# EAGLE board Amplifier_v1.1 (EAGLE 7.1.0)

Size 100 x 80 mm. Coordinates in mm from the lower left corner, seen from the top.
Outline: 0,0 100,0 100,80 0,80 0,0
Copper layers (1*16): Top 0.035mm / dielectric 1.5mm / Bottom 0.035mm
Design rules "default": minimum track width 10mil, minimum drill 24mil, track to track 8mil, track to pad 8mil, pad to pad 8mil, via to via 8mil, smd to smd 8mil, copper to edge 40mil, drill to drill 8mil, minimum pad ring 10mil, minimum via ring 8mil, stop-mask expansion 4mil, vias tented up to drill 0mil, thermal gap 10mil

## Footprints (pad centres in the part's own frame; a part is rotated, then mirrored left to right if it is on the bottom)
SMT_PAD_3MM = smd 3 x 3: PAD 0,0
C025-024X044 = drill 0.813 octagon: 1 -1.27,0; 2 1.27,0
E2,5-6 = drill 0.813 pad 1.6: + -1.27,0 | drill 0.813 pad 1.6 octagon: - 1.27,0
DIL08 = drill 0.813 pad 1.27: 1 -3.81,-3.81; 2 -1.27,-3.81; 3 1.27,-3.81; 4 3.81,-3.81; 5 3.81,3.81; 6 1.27,3.81; 7 -1.27,3.81; 8 -3.81,3.81
SMT_PAD_5MM = smd 5 x 5: PAD 0,0
2-1623788-1 = drill 0.9: P$3 -2.5,0; P$4 2.5,0
0204V = drill 0.813 octagon: 1 -1.27,0; 2 1.27,0
B25U = drill 0.813 long: A 2.54,-0.889; E -2.54,-0.889; S 0,-0.889
NDN0015A = drill 0.7 pad 1.25: 1 0,0; 2 0.965,2.54; 3 1.93,0; 4 2.895,2.54; 5 3.86,0; 6 4.825,2.54; 7 5.79,0; 8 6.755,2.54; 9 7.72,0; 10 8.685,2.54; 11 9.65,0; 12 11.58,2.54; 13 13.51,0; 14 15.44,2.54; 15 17.37,0
TONE_POT_2GANG = drill 1: 1_1 -6,-3; 1_2 -2,-3; 1_3 2,-3; 2_1 -4,-3; 2_2 0,-3; 2_3 4,-3 | hole 1: 6,-3 | hole 3.3: -7.15,0.3; 7.15,0.3
INDUCTOR = drill 0.7 long: 1 -2.5,0; 2 2.5,0
VOL_POT_2GANG = drill 1.3: 1_1 -5,-2; 1_2 0,-2; 1_3 5,-2; 2_1 -5,3; 2_2 0,3; 2_3 5,3
MOLEX_6P = drill 1.8: P$1 6.45,2.42; P$2 -2.15,2.42; P$3 2.15,2.42; P$4 -2.15,8.12; P$5 2.15,8.12; P$6 6.45,8.12 | hole 3: -2.15,-5.08; 6.45,-5.08

## Placement (x,y rotation side)
B_R_B  SMT_PAD_3MM  [SMT_PAD_3MM]  -101.6,-72.39 0 top  (outside the outline)
B_R_B1  SMT_PAD_3MM  [SMT_PAD_3MM]  -127,-735.33 0 top  (outside the outline)
B_R_B2  SMT_PAD_3MM  [SMT_PAD_3MM]  -127,-788.67 0 top  (outside the outline)
B_R_C  SMT_PAD_3MM  [SMT_PAD_3MM]  -101.6,-77.47 0 top  (outside the outline)
B_R_C1  SMT_PAD_3MM  [SMT_PAD_3MM]  -118.11,-735.33 0 top  (outside the outline)
B_R_C2  SMT_PAD_3MM  [SMT_PAD_3MM]  -118.11,-788.67 0 top  (outside the outline)
B_R_E  SMT_PAD_3MM  [SMT_PAD_3MM]  -101.6,-67.31 0 top  (outside the outline)
B_R_E1  SMT_PAD_3MM  [SMT_PAD_3MM]  -152.4,-740.41 0 top  (outside the outline)
B_R_E2  SMT_PAD_3MM  [SMT_PAD_3MM]  -152.4,-793.75 0 top  (outside the outline)
C1  [C025-024X044]  -25.4,93.98 0 top  (outside the outline)
C2  100uF  [E2,5-6]  -91.44,-10.16 0 top  (outside the outline)
C3  [C025-024X044]  -30.48,93.98 0 top  (outside the outline)
C4  [C025-024X044]  -35.56,93.98 0 top  (outside the outline)
C5  [C025-024X044]  -40.64,93.98 0 top  (outside the outline)
C6  [C025-024X044]  -45.72,93.98 0 top  (outside the outline)
C7  [C025-024X044]  -50.8,93.98 0 top  (outside the outline)
C8  [C025-024X044]  -55.88,93.98 0 top  (outside the outline)
C9  [C025-024X044]  -133.35,-840.74 0 top  (outside the outline)
C10  [C025-024X044]  -128.27,-840.74 0 top  (outside the outline)
C11  [C025-024X044]  -123.19,-840.74 0 top  (outside the outline)
C12  [C025-024X044]  -118.11,-840.74 0 top  (outside the outline)
C13  [C025-024X044]  -113.03,-840.74 0 top  (outside the outline)
C14  [C025-024X044]  -107.95,-840.74 0 top  (outside the outline)
C15  [C025-024X044]  -152.4,-849.63 0 top  (outside the outline)
C16  100uF  [E2,5-6]  -91.44,-16.51 0 top  (outside the outline)
C17  0.1uF  [C025-024X044]  -92.71,-22.86 0 top  (outside the outline)
C18  0.1uF  [C025-024X044]  -92.71,-27.94 0 top  (outside the outline)
C19  22pF  [C025-024X044]  -92.71,-34.29 0 top  (outside the outline)
C20  22pF  [C025-024X044]  -101.6,-40.64 0 top  (outside the outline)
C21  22pF  [C025-024X044]  -101.6,-57.15 0 top  (outside the outline)
C22  100uF  [E2,5-6]  -100.33,-140.97 0 top  (outside the outline)
C23  100uF  [E2,5-6]  -100.33,-148.59 0 top  (outside the outline)
C24  0.1uF  [C025-024X044]  -101.6,-154.94 0 top  (outside the outline)
C25  0.1uF  [C025-024X044]  -101.6,-161.29 0 top  (outside the outline)
C26  0.1uF  [C025-024X044]  -101.6,-172.72 0 top  (outside the outline)
C27  100uF  [E2,5-6]  -100.33,-180.34 0 top  (outside the outline)
C29  0.1uF  [C025-024X044]  -106.68,-440.69 0 top  (outside the outline)
C31  0.1uF  [C025-024X044]  -106.68,-454.66 0 top  (outside the outline)
C33  0.1uF  [C025-024X044]  -106.68,-476.25 0 top  (outside the outline)
C35  0.1uF  [C025-024X044]  -100.33,-476.25 0 top  (outside the outline)
C36  100uF  [E2,5-6]  -129.54,-640.08 0 top  (outside the outline)
C37  0.1uF  [C025-024X044]  -106.68,-497.84 0 top  (outside the outline)
C38  100uF  [E2,5-6]  -129.54,-647.7 0 top  (outside the outline)
C39  0.1uF  [C025-024X044]  -100.33,-497.84 0 top  (outside the outline)
C40  0.1uF  [C025-024X044]  -129.54,-654.05 0 top  (outside the outline)
C41  0.1uF  [C025-024X044]  -106.68,-519.43 0 top  (outside the outline)
C42  0.1uF  [C025-024X044]  -129.54,-679.45 0 top  (outside the outline)
C43  0.1uF  [C025-024X044]  -100.33,-519.43 0 top  (outside the outline)
C44  100uF  [E2,5-6]  -135.89,-692.15 0 top  (outside the outline)
C45  0.1uF  [C025-024X044]  -106.68,-541.02 0 top  (outside the outline)
C46  100uF  [E2,5-6]  -123.19,-692.15 0 top  (outside the outline)
C47  0.1uF  [C025-024X044]  -100.33,-541.02 0 top  (outside the outline)
C48  0.1uF  [C025-024X044]  -132.08,-708.66 0 top  (outside the outline)
C49  0.1uF  [C025-024X044]  -106.68,-562.61 0 top  (outside the outline)
C50  0.1uF  [C025-024X044]  -125.73,-708.66 0 top  (outside the outline)
C51  0.1uF  [C025-024X044]  -100.33,-562.61 0 top  (outside the outline)
C52  22pF  [C025-024X044]  -127,-716.28 0 top  (outside the outline)
C53  0.1uF  [C025-024X044]  -106.68,-584.2 0 top  (outside the outline)
C54  22pF  [C025-024X044]  -120.65,-716.28 0 top  (outside the outline)
C55  0.1uF  [C025-024X044]  -100.33,-584.2 0 top  (outside the outline)
C56  22pF  [C025-024X044]  -114.3,-716.28 0 top  (outside the outline)
C57  100uF  [E2,5-6]  -151.13,-702.31 0 top  (outside the outline)
C58  100uF  [E2,5-6]  -138.43,-702.31 0 top  (outside the outline)
C59  0.1uF  [C025-024X044]  -119.38,-708.66 0 top  (outside the outline)
C60  0.1uF  [C025-024X044]  -152.4,-716.28 0 top  (outside the outline)
C61  0.1uF  [C025-024X044]  -146.05,-716.28 0 top  (outside the outline)
C62  100uF  [E2,5-6]  -125.73,-702.31 0 top  (outside the outline)
C63  0.1uF  [C025-024X044]  -139.7,-716.28 0 top  (outside the outline)
C64  0.1uF  [C025-024X044]  -133.35,-716.28 0 top  (outside the outline)
C65  100uF  [E2,5-6]  -135.89,-745.49 0 top  (outside the outline)
C66  100uF  [E2,5-6]  -123.19,-745.49 0 top  (outside the outline)
C67  0.1uF  [C025-024X044]  -132.08,-762 0 top  (outside the outline)
C68  0.1uF  [C025-024X044]  -125.73,-762 0 top  (outside the outline)
C69  22pF  [C025-024X044]  -127,-769.62 0 top  (outside the outline)
C70  22pF  [C025-024X044]  -120.65,-769.62 0 top  (outside the outline)
C71  22pF  [C025-024X044]  -114.3,-769.62 0 top  (outside the outline)
C72  100uF  [E2,5-6]  -151.13,-755.65 0 top  (outside the outline)
C73  100uF  [E2,5-6]  -138.43,-755.65 0 top  (outside the outline)
C74  0.1uF  [C025-024X044]  -119.38,-762 0 top  (outside the outline)
C75  0.1uF  [C025-024X044]  -152.4,-769.62 0 top  (outside the outline)
C76  0.1uF  [C025-024X044]  -146.05,-769.62 0 top  (outside the outline)
C77  100uF  [E2,5-6]  -125.73,-755.65 0 top  (outside the outline)
C78  0.1uF  [C025-024X044]  -139.7,-769.62 0 top  (outside the outline)
C79  0.1uF  [C025-024X044]  -133.35,-769.62 0 top  (outside the outline)
IC1  NE5532N  [DIL08]  -101.6,-222.25 0 top  (outside the outline)
IC2  NE5532N  [DIL08]  -101.6,-232.41 0 top  (outside the outline)
IC3  NE5532N  [DIL08]  -101.6,-303.53 0 top  (outside the outline)
IC4  NE5532N  [DIL08]  -101.6,-360.68 0 top  (outside the outline)
IC5  NE5532N  [DIL08]  -88.9,-360.68 0 top  (outside the outline)
IC6  NE5532N  [DIL08]  -76.2,-360.68 0 top  (outside the outline)
IC7  NE5532N  [DIL08]  -101.6,-283.21 0 top  (outside the outline)
IC10  NE5532N  [DIL08]  -147.32,-822.96 0 top  (outside the outline)
IC11  NE5532N  [DIL08]  -134.62,-822.96 0 top  (outside the outline)
IC12  NE5532N  [DIL08]  -121.92,-822.96 0 top  (outside the outline)
IC13  NE5532N  [DIL08]  -109.22,-822.96 0 top  (outside the outline)
N_B  SMT_PAD_5MM  [SMT_PAD_5MM]  -100.33,-111.76 0 top  (outside the outline)
N_B1  SMT_PAD_5MM  [SMT_PAD_5MM]  -125.73,-728.98 0 top  (outside the outline)
N_B2  SMT_PAD_5MM  [SMT_PAD_5MM]  -125.73,-782.32 0 top  (outside the outline)
N_D  SMT_PAD_5MM  [SMT_PAD_5MM]  -100.33,-124.46 0 top  (outside the outline)
N_D1  SMT_PAD_5MM  [SMT_PAD_5MM]  -119.38,-728.98 0 top  (outside the outline)
N_D2  SMT_PAD_5MM  [SMT_PAD_5MM]  -119.38,-782.32 0 top  (outside the outline)
N_S  SMT_PAD_5MM  [SMT_PAD_5MM]  -100.33,-118.11 0 top  (outside the outline)
N_S1  SMT_PAD_5MM  [SMT_PAD_5MM]  -152.4,-735.33 0 top  (outside the outline)
N_S2  SMT_PAD_5MM  [SMT_PAD_5MM]  -152.4,-788.67 0 top  (outside the outline)
P_B  SMT_PAD_5MM  [SMT_PAD_5MM]  -100.33,-92.71 0 top  (outside the outline)
P_B1  SMT_PAD_5MM  [SMT_PAD_5MM]  -146.05,-735.33 0 top  (outside the outline)
P_B2  SMT_PAD_5MM  [SMT_PAD_5MM]  -146.05,-788.67 0 top  (outside the outline)
P_D  SMT_PAD_5MM  [SMT_PAD_5MM]  -100.33,-99.06 0 top  (outside the outline)
P_D1  SMT_PAD_5MM  [SMT_PAD_5MM]  -139.7,-735.33 0 top  (outside the outline)
P_D2  SMT_PAD_5MM  [SMT_PAD_5MM]  -139.7,-788.67 0 top  (outside the outline)
P_S  SMT_PAD_5MM  [SMT_PAD_5MM]  -100.33,-105.41 0 top  (outside the outline)
P_S1  SMT_PAD_5MM  [SMT_PAD_5MM]  -133.35,-735.33 0 top  (outside the outline)
P_S2  SMT_PAD_5MM  [SMT_PAD_5MM]  -133.35,-788.67 0 top  (outside the outline)
PR1  0.1  [2-1623788-1]  -177.8,-890.27 0 top  (outside the outline)
PR2  0.1  [2-1623788-1]  -191.77,-890.27 0 top  (outside the outline)
PR3  0.1  [2-1623788-1]  -205.74,-890.27 0 top  (outside the outline)
PR4  0.1  [2-1623788-1]  -219.71,-890.27 0 top  (outside the outline)
PR5  0.1  [2-1623788-1]  -233.68,-890.27 0 top  (outside the outline)
PR6  0.1  [2-1623788-1]  -247.65,-890.27 0 top  (outside the outline)
R1  [0204V]  -147.32,-849.63 0 top  (outside the outline)
R2  [0204V]  -54.61,62.23 0 top  (outside the outline)
R3  [0204V]  -104.14,-292.1 0 top  (outside the outline)
R4  [0204V]  -104.14,-297.18 0 top  (outside the outline)
R5  [0204V]  -104.14,-331.47 0 top  (outside the outline)
R6  [0204V]  -85.09,62.23 0 top  (outside the outline)
R7  [0204V]  -17.78,73.66 0 top  (outside the outline)
R8  [0204V]  -27.94,73.66 0 top  (outside the outline)
R9  [0204V]  -38.1,73.66 0 top  (outside the outline)
R10  [0204V]  -48.26,73.66 0 top  (outside the outline)
R11  [0204V]  -58.42,73.66 0 top  (outside the outline)
R12  [0204V]  -68.58,73.66 0 top  (outside the outline)
R13  [0204V]  -78.74,73.66 0 top  (outside the outline)
R14  [0204V]  -88.9,73.66 0 top  (outside the outline)
R15  [0204V]  -17.78,78.74 0 top  (outside the outline)
R16  [0204V]  -93.98,-321.31 0 top  (outside the outline)
R17  [0204V]  -104.14,-326.39 0 top  (outside the outline)
R18  [0204V]  -93.98,-326.39 0 top  (outside the outline)
R19  [0204V]  -142.24,-849.63 0 top  (outside the outline)
R20  [0204V]  -137.16,-849.63 0 top  (outside the outline)
R21  [0204V]  -132.08,-849.63 0 top  (outside the outline)
R22  [0204V]  -127,-849.63 0 top  (outside the outline)
R23  [0204V]  -121.92,-849.63 0 top  (outside the outline)
R24  [0204V]  -116.84,-849.63 0 top  (outside the outline)
R25  [0204V]  -111.76,-849.63 0 top  (outside the outline)
R26  [0204V]  -106.68,-849.63 0 top  (outside the outline)
R27  [0204V]  -151.13,-854.71 0 top  (outside the outline)
R28  [0204V]  -146.05,-854.71 0 top  (outside the outline)
R29  [0204V]  -140.97,-854.71 0 top  (outside the outline)
R30  [0204V]  -135.89,-854.71 0 top  (outside the outline)
R31  [0204V]  -130.81,-854.71 0 top  (outside the outline)
R32  [0204V]  -125.73,-854.71 0 top  (outside the outline)
R33  [0204V]  -120.65,-854.71 0 top  (outside the outline)
R34  [0204V]  -48.26,88.9 0 top  (outside the outline)
R35  [0204V]  -58.42,88.9 0 top  (outside the outline)
R36  [0204V]  -115.57,-854.71 0 top  (outside the outline)
R37  [0204V]  -110.49,-854.71 0 top  (outside the outline)
R38  [0204V]  -105.41,-854.71 0 top  (outside the outline)
R39  [0204V]  -166.37,-894.08 0 top  (outside the outline)
R43  [B25U]  -100.33,-31.75 0 top  (outside the outline)
R44  1.2k  [0204V]  -99.06,-46.99 0 top  (outside the outline)
R45  500  [0204V]  -99.06,-52.07 0 top  (outside the outline)
R46  12k  [0204V]  -99.06,-63.5 0 top  (outside the outline)
R47  1.2k  [0204V]  -99.06,-82.55 0 top  (outside the outline)
R48  1.2k  [0204V]  -99.06,-87.63 0 top  (outside the outline)
R51  10  [0204V]  -99.06,-167.64 0 top  (outside the outline)
R52  1.2k  [0204V]  -99.06,-186.69 0 top  (outside the outline)
R53  1.2k  [0204V]  -129.54,-660.4 0 top  (outside the outline)
R54  1.2k  [0204V]  -129.54,-666.75 0 top  (outside the outline)
R55  1.2k  [0204V]  -129.54,-673.1 0 top  (outside the outline)
R56  1.2k  [0204V]  -129.54,-685.8 0 top  (outside the outline)
R57  [B25U]  -137.16,-681.99 0 top  (outside the outline)
R58  [B25U]  -151.13,-694.69 0 top  (outside the outline)
R59  1.2k  [0204V]  -151.13,-722.63 0 top  (outside the outline)
R60  500  [0204V]  -146.05,-722.63 0 top  (outside the outline)
R61  12k  [0204V]  -140.97,-722.63 0 top  (outside the outline)
R62  1.2k  [0204V]  -135.89,-722.63 0 top  (outside the outline)
R63  1.2k  [0204V]  -130.81,-722.63 0 top  (outside the outline)
R66  10  [0204V]  -115.57,-722.63 0 top  (outside the outline)
R67  1.2k  [0204V]  -151.13,-728.98 0 top  (outside the outline)
R68  1.2k  [0204V]  -146.05,-728.98 0 top  (outside the outline)
R69  1.2k  [0204V]  -140.97,-728.98 0 top  (outside the outline)
R70  1.2k  [0204V]  -135.89,-728.98 0 top  (outside the outline)
R71  1.2k  [0204V]  -130.81,-728.98 0 top  (outside the outline)
R72  [B25U]  -143.51,-694.69 0 top  (outside the outline)
R73  [B25U]  -151.13,-748.03 0 top  (outside the outline)
R74  1.2k  [0204V]  -151.13,-775.97 0 top  (outside the outline)
R75  500  [0204V]  -146.05,-775.97 0 top  (outside the outline)
R76  12k  [0204V]  -140.97,-775.97 0 top  (outside the outline)
R77  1.2k  [0204V]  -135.89,-775.97 0 top  (outside the outline)
R78  1.2k  [0204V]  -130.81,-775.97 0 top  (outside the outline)
R81  10  [0204V]  -115.57,-775.97 0 top  (outside the outline)
R82  1.2k  [0204V]  -151.13,-782.32 0 top  (outside the outline)
R83  1.2k  [0204V]  -146.05,-782.32 0 top  (outside the outline)
R84  1.2k  [0204V]  -140.97,-782.32 0 top  (outside the outline)
R85  1.2k  [0204V]  -135.89,-782.32 0 top  (outside the outline)
R86  1.2k  [0204V]  -130.81,-782.32 0 top  (outside the outline)
R87  [B25U]  -143.51,-748.03 0 top  (outside the outline)
R88  [0204V]  -151.13,-859.79 0 top  (outside the outline)
R89  [0204V]  -151.13,-864.87 0 top  (outside the outline)
R90  [0204V]  -151.13,-869.95 0 top  (outside the outline)
R91  [0204V]  -151.13,-875.03 0 top  (outside the outline)
R92  [0204V]  -151.13,-880.11 0 top  (outside the outline)
U1  LME49830  [NDN0015A]  -153.67,-711.2 0 top  (outside the outline)
U2  LME49830  [NDN0015A]  -153.67,-764.54 0 top  (outside the outline)
U8  LME49830  [NDN0015A]  -93.98,-5.08 0 top  (outside the outline)
U$1  TONE_POT_2GANG  [TONE_POT_2GANG]  -99.06,-407.67 0 top  (outside the outline)
U$2  INDUCTOR  [INDUCTOR]  -20.32,54.61 0 top  (outside the outline)
U$3  INDUCTOR  [INDUCTOR]  -34.29,54.61 0 top  (outside the outline)
U$4  INDUCTOR  [INDUCTOR]  -48.26,54.61 0 top  (outside the outline)
U$5  INDUCTOR  [INDUCTOR]  -62.23,54.61 0 top  (outside the outline)
U$6  INDUCTOR  [INDUCTOR]  -76.2,54.61 0 top  (outside the outline)
U$7  INDUCTOR  [INDUCTOR]  -90.17,54.61 0 top  (outside the outline)
U$8  INDUCTOR  [INDUCTOR]  -133.35,-812.8 0 top  (outside the outline)
U$9  INDUCTOR  [INDUCTOR]  -119.38,-812.8 0 top  (outside the outline)
U$10  INDUCTOR  [INDUCTOR]  -148.59,-801.37 0 top  (outside the outline)
U$11  INDUCTOR  [INDUCTOR]  -133.35,-801.37 0 top  (outside the outline)
U$12  INDUCTOR  [INDUCTOR]  -118.11,-801.37 0 top  (outside the outline)
U$13  TONE_POT_2GANG  [TONE_POT_2GANG]  -99.06,-416.56 0 top  (outside the outline)
U$14  TONE_POT_2GANG  [TONE_POT_2GANG]  -99.06,-425.45 0 top  (outside the outline)
U$15  INDUCTOR  [INDUCTOR]  -148.59,-812.8 0 top  (outside the outline)
U$16  VOL_POT_2GANG  [VOL_POT_2GANG]  -96.52,-212.09 0 top  (outside the outline)
U$17  MOLEX_6P  [MOLEX_6P]  -149.86,-679.45 0 top  (outside the outline)
U$18  VOL_POT_2GANG  [VOL_POT_2GANG]  -147.32,-833.12 0 top  (outside the outline)
U$19  TONE_POT_2GANG  [TONE_POT_2GANG]  -130.81,-831.85 0 top  (outside the outline)
U$20  TONE_POT_2GANG  [TONE_POT_2GANG]  -111.76,-831.85 0 top  (outside the outline)
U$21  TONE_POT_2GANG  [TONE_POT_2GANG]  -144.78,-840.74 0 top  (outside the outline)
U$22  MOLEX_6P  [MOLEX_6P]  -165.1,-881.38 0 top  (outside the outline)

## Library data of the parts
B_R_B B_R_B1 B_R_B2 B_R_C B_R_C1 B_R_C2 B_R_E B_R_E1 B_R_E2 N_B N_B1 N_B2 N_D N_D1 N_D2 N_S N_S1 N_S2 P_B P_B1 P_B2 P_D P_D1 P_D2 P_S P_S1 P_S2 U$1-U$22 = Amplifier_Parts
C1-C27 C29 C31 C33 C35-C79 R1-R39 R44-R48 R51-R56 R59-R63 R66-R71 R74-R78 R81-R86 R88-R92 = rcl
IC1-IC7 IC10-IC13 = linear
PR1 PR3 PR4 = Power Resistors; MAX_POWER: 5W; POWER_LEVEL: 5W
PR2 PR5 PR6 = Power Resistors; POWER_LEVEL: 5W
R43 R57 R58 R72 R73 R87 = pot
U1 U2 U8 = texas

## Nets
+12V: C31.2 C35.2 C36.+ C39.2 C43.2 C47.2 C51.2 C55.2 U$22.P$1
-12V: C29.1 C33.1 C37.1 C38.- C41.1 C45.1 C49.1 C53.1 U$22.P$6
GND: C2.+ C3.1 C4.1 C7.2 C8.2 C10.1 C11.1 C14.2 C15.2 C16.- C17.1 C18.2 C22.- C23.+ C24.2 C25.1 C26.1 C27.- C29.2 C31.1 C33.2 C35.1 C36.- C37.2 C38.+ C39.1 C40.1 C41.2 C42.1 C43.1 C44.+ C45.2 C46.- C47.1 C48.1 C49.2 C50.2 C51.1 C53.2 C55.1 C57.- C58.+ C59.2 C60.1 C61.1 C62.- C63.1 C64.1 C65.+ C66.- C67.1 C68.2 C72.- C73.+ C74.2 C75.1 C76.1 C77.- C78.1 C79.1 IC1.4 IC1.5 IC1.8 IC2.4 IC2.5 IC2.8 IC3.4 IC3.5 IC3.8 IC4.4 IC4.8 IC5.4 IC5.8 IC6.4 IC6.8 IC7.3 IC7.4 IC7.8 IC10.5 IC11.5 IC12.3 IC13.5 R3.2 R5.1 R7.1 R10.1 R13.1 R15.1 R20.1 R23.1 R26.1 R28.1 R31.2 R38.1 R53.2 R68.2 R83.2 U1.3 U2.3 U8.3 U$3.1 U$4.1 U$5.1 U$6.1 U$9.1 U$10.1 U$11.1 U$12.1 U$17.P$2 U$17.P$4 U$17.P$6 U$22.P$4
N$1: IC7.2 R2.2 U$16.1_1
N$2: C1.1 IC7.1 U$16.1_2 U$16.1_3
N$3: IC12.2 R1.2 U$18.1_1
N$4: R48.2 U8.14
N$5: C9.1 IC12.1 U$18.1_2 U$18.1_3
N$6: IC1.2 R7.2 R8.1
N$7: C4.2 IC1.3 R3.1 U$2.1
N$8: B_R_C1.PAD C54.2 R58.E R59.1
N$9: IC2.2 R12.1 R13.2
N$10: R54.2 R88.2 R89.2 R90.2
N$11: IC1.6 R6.2 R34.1
N$12: C3.2 R4.2 U$2.2
N$13: C5.2 R9.2 U$3.2
N$14: C11.2 IC10.3 R31.1 U$8.1
N$15: IC3.1 R16.1 R17.2
N$16: C40.2 R53.1 R54.1 U8.4
N$17: IC2.1 R11.1 R12.2
N$18: IC2.6 R11.2 R35.1
N$19: IC3.6 R16.2 R18.1
N$20: B_R_B1.PAD C54.1 R58.A R58.S R60.2
N$21: IC3.7 R88.1 U$14.1_2 U$14.1_3
N$22: C1.2 R4.1 R9.1 R14.1
N$23: C7.1 R14.2 U$6.2 U$7.2
N$24: R18.2 U$14.1_1
N$25: IC10.6 R19.2 R29.1
N$26: R2.1 U$22.P$3
N$27: IC3.2 R5.2 R17.1
N$28: C52.2 R59.2 U1.12
N$29: C6.1 U$7.1
N$30: C12.2 R22.2 U$9.2
N$31: R55.1 R57.A U8.5
N$32: IC11.1 R24.1 R25.2
N$33: IC11.6 R24.2 R30.1
N$34: C14.1 R27.2 U$12.2 U$15.2
N$35: C13.1 U$15.1
N$36: C42.2 R55.2
N$37: R29.2 U$19.1_1
N$38: R39.1 R84.2 R91.2 R92.2
N$39: B_R_E1.PAD C52.1 C56.1 R60.1 U1.11
N$40: R56.2 R57.E R57.S
N$41: IC11.7 R91.1 U$20.1_2 U$20.1_3
N$42: R30.2 U$20.1_1
N$43: IC10.1 R19.1 R21.2
N$44: C10.2 R32.2 U$8.2
N$45: IC10.2 R20.2 R21.1
N$46: IC11.2 R25.1 R26.2
N$47: IC13.1 R33.1 R36.2
N$48: C56.2 U1.6
N$49: IC13.6 R33.2 R37.1
N$50: IC13.7 R92.1 U$21.1_2 U$21.1_3
N$51: R62.2 U1.13
N$52: P_B1.PAD R61.2 R63.1
N$53: R34.2 U$1.1_1
N$54: IC1.7 R90.1 U$1.1_2 U$1.1_3
N$55: IC2.7 R89.1 U$13.1_2 U$13.1_3
N$56: R35.2 U$13.1_1
N$57: R37.2 U$21.1_1
N$58: IC13.2 R36.1 R38.2
N$59: C13.2 C15.1 IC13.3 R28.2 U$11.2
N$60: C9.2 R22.1 R27.1 R32.1
N$61: C12.1 IC11.3 R23.2 U$10.2
N$62: N_B1.PAD R61.1 R62.1
N$63: C5.1 IC2.3 R10.2 U$4.2
N$64: IC10.7 R39.2 R69.2 U$19.1_2 U$19.1_3
N$65: B_R_C.PAD C20.2 R43.E R44.1
N$66: C21.2 U8.6
N$67: B_R_E.PAD C19.1 C21.1 R45.1 U8.11
N$68: B_R_B.PAD C20.1 R43.A R43.S R45.2
N$69: C19.2 R44.2 U8.12
N$70: R47.2 U8.13
N$71: P_S1.PAD PR1.P$4
N$72: P_B.PAD R46.2 R48.1
N$73: N_B.PAD R46.1 R47.1
N$74: P_S.PAD PR4.P$4
N$75: PR3.P$4 PR4.P$3 R51.2 R56.1 U8.8 U$17.P$1
N$76: PR1.P$3 PR2.P$4 R66.2 R71.1 U1.8 U$17.P$3
N$77: C61.2 R66.1
N$78: C62.+ R67.2 U1.2
N$79: R63.2 U1.14
N$80: C63.2 R68.1 R69.1 U1.4
N$81: C64.2 R70.2
N$82: R70.1 R72.A U1.5
N$83: R71.2 R72.E R72.S
N$84: C26.2 R51.1
N$85: C27.+ R52.2 U8.2
N$86: B_R_C2.PAD C70.2 R73.E R74.1
N$87: B_R_B2.PAD C70.1 R73.A R73.S R75.2
N$88: IC1.1 R6.1 R8.2
N$89: C69.2 R74.2 U2.12
N$90: B_R_E2.PAD C69.1 C71.1 R75.1 U2.11
N$91: C71.2 U2.6
N$92: R77.2 U2.13
N$93: P_B2.PAD R76.2 R78.1
N$94: N_B2.PAD R76.1 R77.1
N$95: P_S2.PAD PR5.P$4
N$96: PR5.P$3 PR6.P$4 R81.2 R86.1 U2.8 U$17.P$5
N$97: C76.2 R81.1
N$98: C77.+ R82.2 U2.2
N$99: R78.2 U2.14
N$100: C78.2 R83.1 R84.1 U2.4
N$101: C79.2 R85.2
N$102: R85.1 R87.A U2.5
N$103: R86.2 R87.E R87.S
N$104: C6.2 C8.1 IC3.3 R15.2 U$5.2
N$105: U$22.P$2
N$106: N_S1.PAD PR2.P$3
N$108: R1.1 U$22.P$5
N$109: N_S2.PAD PR6.P$3
N$110: N_S.PAD PR3.P$3
V+: C16.+ C18.1 C46.+ C50.1 C66.+ C68.1 U1.15 U2.15 U8.15
V-: C2.- C17.2 C23.- C25.2 C44.- C48.2 C58.- C60.2 C65.- C67.2 C73.- C75.2 IC10.4 IC11.4 IC12.4 IC13.4 N_D1.PAD N_D2.PAD N_D.PAD U1.10 U2.10 U8.10
VCC: C22.+ C24.1 C57.+ C59.1 C72.+ C74.1 IC10.8 IC11.8 IC12.8 IC13.8 P_D1.PAD P_D2.PAD P_D.PAD

## Tracks (layer width: path | path; a pad name or v marks a point on that pad's centre or on a via)
+12V  (8 unrouted)
-12V  (8 unrouted)
GND  (111 unrouted)
N$1  (2 unrouted)
N$2  (3 unrouted)
N$3  (2 unrouted)
N$4  (1 unrouted)
N$5  (3 unrouted)
N$6  (2 unrouted)
N$7  (3 unrouted)
N$8  (3 unrouted)
N$9  (2 unrouted)
N$10  (3 unrouted)
N$11  (2 unrouted)
N$12  (2 unrouted)
N$13  (2 unrouted)
N$14  (3 unrouted)
N$15  (2 unrouted)
N$16  (3 unrouted)
N$17  (2 unrouted)
N$18  (2 unrouted)
N$19  (2 unrouted)
N$20  (4 unrouted)
N$21  (3 unrouted)
N$22  (3 unrouted)
N$23  (3 unrouted)
N$24  (1 unrouted)
N$25  (2 unrouted)
N$26  (1 unrouted)
N$27  (2 unrouted)
N$28  (2 unrouted)
N$29  (1 unrouted)
N$30  (2 unrouted)
N$31  (2 unrouted)
N$32  (2 unrouted)
N$33  (2 unrouted)
N$34  (3 unrouted)
N$35  (1 unrouted)
N$36  (1 unrouted)
N$37  (1 unrouted)
N$38  (3 unrouted)
N$39  (4 unrouted)
N$40  (2 unrouted)
N$41  (3 unrouted)
N$42  (1 unrouted)
N$43  (2 unrouted)
N$44  (2 unrouted)
N$45  (2 unrouted)
N$46  (2 unrouted)
N$47  (2 unrouted)
N$48  (1 unrouted)
N$49  (2 unrouted)
N$50  (3 unrouted)
N$51  (1 unrouted)
N$52  (2 unrouted)
N$53  (1 unrouted)
N$54  (3 unrouted)
N$55  (3 unrouted)
N$56  (1 unrouted)
N$57  (1 unrouted)
N$58  (2 unrouted)
N$59  (4 unrouted)
N$60  (3 unrouted)
N$61  (3 unrouted)
N$62  (2 unrouted)
N$63  (3 unrouted)
N$64  (4 unrouted)
N$65  (3 unrouted)
N$66  (1 unrouted)
N$67  (4 unrouted)
N$68  (4 unrouted)
N$69  (2 unrouted)
N$70  (1 unrouted)
N$71  (1 unrouted)
N$72  (2 unrouted)
N$73  (2 unrouted)
N$74  (1 unrouted)
N$75  (5 unrouted)
N$76  (5 unrouted)
N$77  (1 unrouted)
N$78  (2 unrouted)
N$79  (1 unrouted)
N$80  (3 unrouted)
N$81  (1 unrouted)
N$82  (2 unrouted)
N$83  (2 unrouted)
N$84  (1 unrouted)
N$85  (2 unrouted)
N$86  (3 unrouted)
N$87  (4 unrouted)
N$88  (2 unrouted)
N$89  (2 unrouted)
N$90  (4 unrouted)
N$91  (1 unrouted)
N$92  (1 unrouted)
N$93  (2 unrouted)
N$94  (2 unrouted)
N$95  (1 unrouted)
N$96  (5 unrouted)
N$97  (1 unrouted)
N$98  (2 unrouted)
N$99  (1 unrouted)
N$100  (3 unrouted)
N$101  (1 unrouted)
N$102  (2 unrouted)
N$103  (2 unrouted)
N$104  (4 unrouted)
N$106  (1 unrouted)
N$108  (1 unrouted)
N$109  (1 unrouted)
N$110  (1 unrouted)
V+  (8 unrouted)
V-  (21 unrouted)
VCC  (12 unrouted)